# Altium PCB stc15.PcbDoc
Units mil, origin at the board's own origin, x right, y up, seen from the top; angles counter-clockwise.
Board outline 820 x 900 mil, 2 copper layers (Top Layer, Bottom Layer); 10 components, 12 nets, 53 pads, 8 vias.
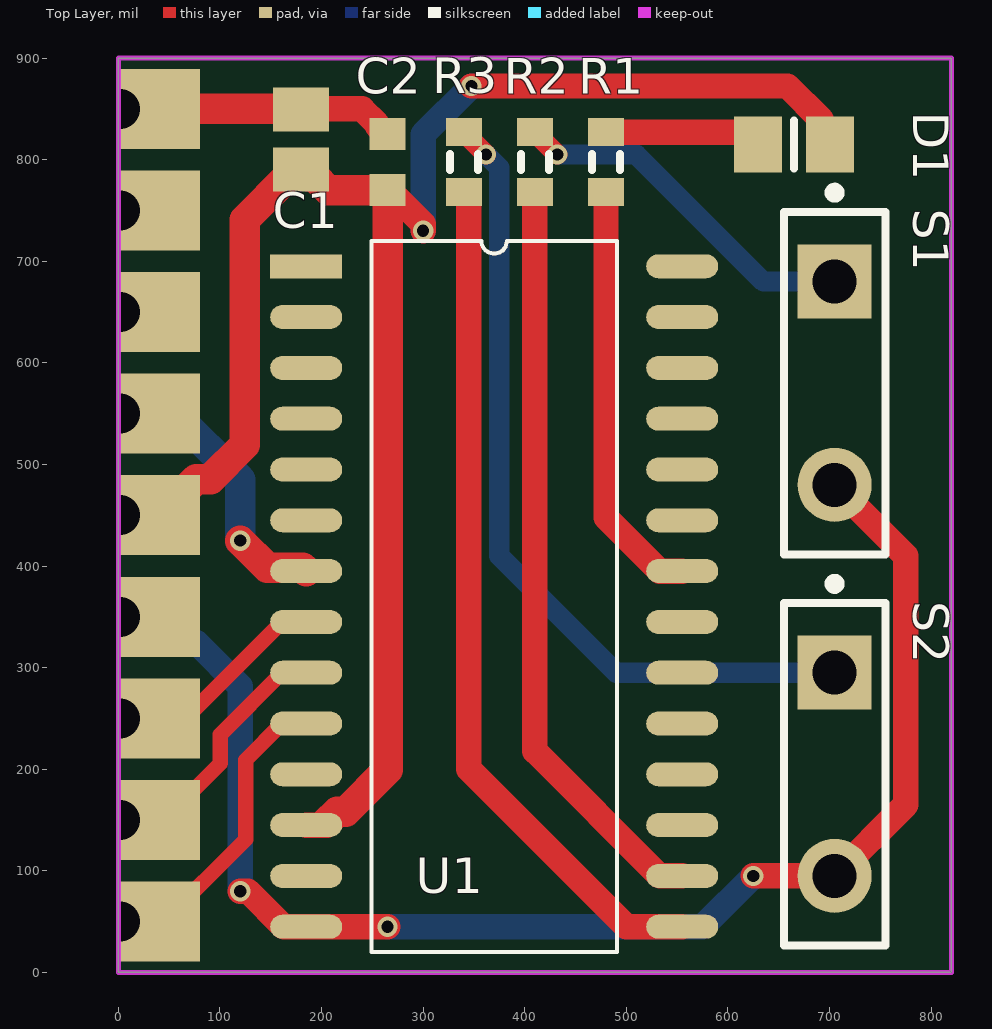
[diagram p0: Top Layer view]
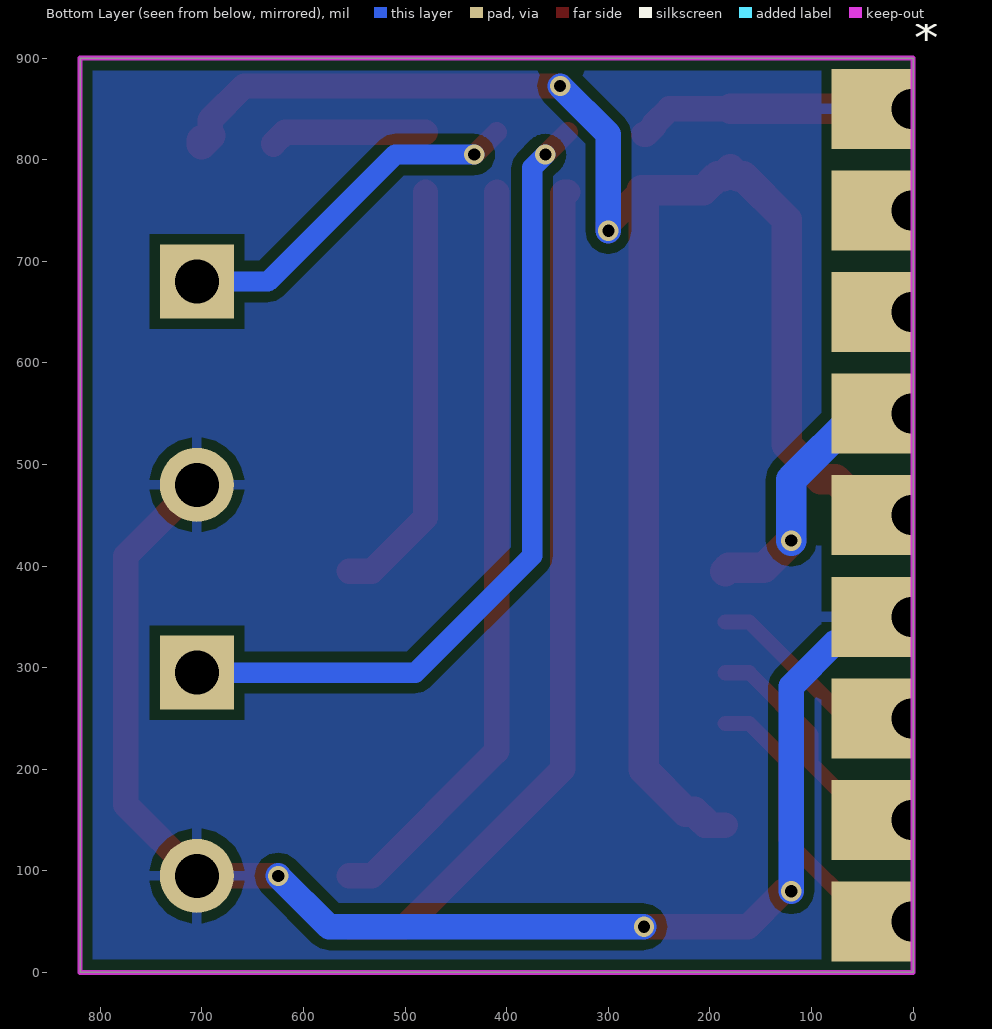
[diagram p1: Bottom Layer view, seen from below]

## Layer stack, top to bottom
Top Solder: solder mask 0.4, Solder Resist, Dk 3.5
Top Layer: signal copper 1.4
Dielectric 1: dielectric 12.6, FR-4, Dk 4.8
Bottom Layer: signal copper 1.4
Bottom Solder: solder mask 0.4, Solder Resist, Dk 3.5

## Board outline
0,0 0,900 820,900 820,0

## Design rules (kind name [scope] priority, off if disabled: settings)
Clearance [All] p1: gap=10 ignorepadtopadclearanceinfootprint=FALSE except(0: Arc-Hole Track-Hole SMDPad-Hole THPad-Hole Via-Hole Fill-Hole Poly-Hole Region-Hole Text-Hole)
PolygonConnect [All] p1: connectstyle=Relief reliefconductorwidth=10 reliefentries=4 polygonreliefangle="90 Angle" airgapwidth=10
RoutingVias [All] p1: holewidth=20 width=25 viastyle="Through Hole" minholewidth=12 minwidth=20 maxholewidth=25 maxwidth=30
SolderMaskExpansion [All] p1: expansion=4 istentingtop=FALSE
Width [All] p1: maxlimit=30 minlimit=15 preferedwidth=25 minimp=50.000000 maximp=50.000000 favimp=50.000000
Width Width_GND [InNet('GND')] p2: maxlimit=30 minlimit=20 preferedwidth=30 minimp=50.000000 maximp=50.000000 favimp=50.000000
30 further rules are at their usual default settings.

## Classes and differential pairs
component class stc15: * C1 C2 D1 R1 R2 R3 S1 S2

## Components (designator, comment, footprint, x,y, rotation, side; value= is the part's Value field where it differs from the comment)
* "9" 9 1.68,50 r90 bottom
C1 "Cap Pol3" C0805 180,820 r90 top value=100pF
C2 "Cap Semi" 1608[0603] 265,797.44 r270 top value=100pF
D1 "LED2" 6-0805_N 665,815 r180 top
R1 "Res3" J1-0603 480,797.44 r90 top value=1K
R2 "Res3" J1-0603 410,797.44 r90 top value=1K
R3 "Res3" J1-0603 340,797.44 r90 top value=1K
S1 "SW-PB" SPST-2 705,580 r270 top
S2 "SW-PB" SPST-2 705,195 r270 top
U1 "STC15W401AS_SOP28_TSSOP28_SKDIP28" SOP28 184.92,695 r0 top

## Footprints (in the part's own frame and the unit in brackets; to place one, negate y for a bottom-side part, rotate by r counter-clockwise, add the part's x,y. Pads: shape width x height; smd on the part's side, far side on the other; paste and mask are expansions set on the pad)
6-0805_N [mm] "Chip Resistor, Body 2.0x1.2mm, IPC Medium Density"
  rect 1.2x1.4 smd: 1(-0.9,0) 2(0.9,0)
  silkscreen extent 0,-0.6 0,0.6, body extent -1.07,-0.7 1.07,0.7, height 0.7
9 [mm]
  rect 2x2 hole 1 copper offset 0,1: 1(0,0) 2(2.54,0) 3(5.08,0) 4(7.62,0) 5(10.16,0) 6(12.7,0) 7(15.24,0) 8(17.78,0) 9(20.32,0)
1608[0603] [mm] "Chip Capacitor, Body 1.6x0.8mm, IPC High Density"
  rect 0.8x0.9 smd: 1(-0.7,0) 2(0.7,0)
  body extent -0.87,-0.48 0.87,0.48, height 1.3
C0805 [mm] "Chip Capacitor, Body 2.0x1.3mm, IPC High Density"
  rect 1.1x1.4 smd: 1(-0.75,0) 2(0.75,0)
  body extent -1.1,-0.72 1.1,0.72, height 1.4
J1-0603 [mm] "Chip Resistor, Body 1.6x0.8mm, IPC High Density"
  rect 0.7x0.9 smd: 1(-0.75,0) 2(0.75,0)
  silkscreen extent -0.2,-0.35 0.2,0.35, body extent -0.85,-0.48 0.85,0.48, height 0.9
SOP28 [mm]
  rect 1.8x0.6 smd: 1(0,0)
  oval 1.8x0.6 smd: 2(0,-1.27) 3(0,-2.54) 4(0,-3.81) 5(0,-5.08) 6(0,-6.35) 7(0,-7.62) 8(0,-8.89) 9(0,-10.16) 10(0,-11.43) 11(0,-12.7) 12(0,-13.97) 13(0,-15.24) 14(0,-16.51) 15(9.4,-16.51) 16(9.4,-15.24) 17(9.4,-13.97) 18(9.4,-12.7) 19(9.4,-11.43) 20(9.4,-10.16) 21(9.4,-8.89) 22(9.4,-7.62) 23(9.4,-6.35) 24(9.4,-5.08) 25(9.4,-3.81) 26(9.4,-2.54) 27(9.4,-1.27) 28(9.4,0)
  silkscreen extent 1.64,-17.14 7.77,0.64
SPST-2 [mm] "Switch; 2 Leads"
  rect 1.85x1.85 hole 1.1: 1(-2.54,0)
  round 1.85 hole 1.1: 2(2.54,0)
  silkscreen extent -4.89,-1.27 4.28,1.27

## Part data
C1: "Polarized Capacitor (Surface Mount)", LatestRevisionDate=29-May-2009, LatestRevisionNote="IPC-7351 Footprint Added.", PackageDescription="Chip Capacitor", PackageReference=C0805, Published=8-Jun-2000, Publisher="Altium Limited"
C2: "Capacitor (Semiconductor SIM Model)", LatestRevisionDate=29-May-2009, LatestRevisionNote="IPC-7351 Footprint Added.", PackageDescription="Chip Capacitor", PackageReference=C1206, Published=8-Jun-2000, Publisher="Altium Limited"
D1: "Typical RED, GREEN, YELLOW, AMBER GaAs LED", LatestRevisionDate=17-Jul-2002, LatestRevisionNote="Re-released for DXP Platform.", PackageDescription="SM LED; 2 Flat Leads", PackageReference=3.2X1.6X1.1, PackageVersion=Feb-2002, Published=8-Jun-2000, Publisher="Altium Limited"
R1 R2 R3: "Resistor", LatestRevisionDate=29-May-2009, LatestRevisionNote="IPC-7351 Footprint Added.", PackageDescription="Chip Resistor", PackageReference=J1-0603, Published=8-Jun-2000, Publisher="Altium Limited"
S1 S2: "Switch", LatestRevisionDate=17-Jul-2002, LatestRevisionNote="Re-released for DXP Platform.", PackageDescription="Switch; 2 Leads", PackageReference=SPST-2, Published=24-Mar-1999, Publisher="Altium Limited"

## Via types
v1: diameter 20, hole 12, Top Layer to Bottom Layer, 8 vias

## Nets (pads, with @x,y where several pads share a name; then routed paths per layer and width w, separated by ;. In a path a pad name is that pad's centre, name@x,y a point inside that pad or via, vN(x,y) a via of type N, cw(c..) or ccw(c..) an arc to the next point about the centre after c; other vN are vias at no path point)
CH1: *.1 U1.10 | length 309.8
  Top Layer w15: *.1 44.55,50 125.43,130.88 125.43,209.13 161.3,245 U1.10
CH2: *.2 U1.9 | length 259.8
  Top Layer w15: *.2 44.55,150 100.43,205.88 100.43,234.13 161.3,295 U1.9
CH3: *.3 U1.8 | length 222.6
  Top Layer w15: *.3 66.3,250 161.3,345 U1.8
GND: *.4 *.9 C1.2 C2.1 S1.2 S2.2 U1.14 | length 1686.3
  Top Layer w25: v1(120,80) 127.68,80 162.68,45 U1.14 v1(265,45) ; C1.2@179.53,850 240,850 254.64,835.36 254.64,833.39 263.03,825 C2.1 ; v1(625,95) S2.2 775,165 775,410 S1.2
  Top Layer w30: *.9 C1.2@179.53,850
  Bottom Layer w25: *.4 27.34,324.34 77.27,324.34 120,281.62 v1(120,80) ; v1(265,45) 575,45 v1(625,95)
NetD1_2: D1.2 R1.2 | length 155
  Top Layer w25: R1.2 618.44,826.97 629.57,815.85 D1.2
NetR1_1: R1.1 U1.22 | length 417
  Top Layer w25: R1.1 480,447.76 532.76,395 U1.22
NetR2_1: R2.1 U1.16 | length 746
  Top Layer w25: R2.1 410,217.76 532.76,95 U1.16
NetR2_2: R2.2 S1.1 | length 355.9
  Top Layer w20: R2.2 v1(431.97,805)
  Bottom Layer w20: v1(431.97,805) 510,805 635,680 S1.1
NetR3_1: R3.1 U1.15 | length 846.4
  Top Layer w25: R3.1 343.72,767.91 345,766.63 345,200 500,45 U1.15
NetR3_2: R3.2 S2.1 | length 809.1
  Top Layer w20: R3.2 v1(361.97,805)
  Bottom Layer w20: v1(361.97,805) 375,791.97 375,410 490,295 S2.1
RSSI: *.6 U1.7 | length 282.7
  Top Layer w30: v1(120,425) 146.81,398.19 181.73,398.19 U1.7
  Bottom Layer w30: *.6 55.15,550 120,485.15 v1(120,425)
VCC: *.5 C1.1 C2.2 D1.1 U1.12 | length 1833.4
  Top Layer w25: U1.12 205.35,145 U1.12@205.35,148.19 ; C2.2@266.97,769.88 300,736.85 v1(300,730) ; v1(347.5,872.5) 658.6,872.5 691.81,839.29 D1.1@691.81,823.62
  Top Layer w30: *.5 55.15,450 55.15,464.1 76.69,485.63 90.78,485.63 124.49,519.34 124.49,740.87 167.44,783.82 173.35,783.82 C1.1 186.65,783.82 192.56,783.82 206.5,769.88 C2.2 ; U1.12@205.35,148.19 215.35,158.19 223.79,158.19 265,199.4 C2.2 ; C2.2@266.97,769.88 C2.2 ; D1.1@691.81,823.62 D1.1 D1.1@700.43,818.94
  Bottom Layer w25: v1(300,730) 300,825 v1(347.5,872.5)
pads on no net: *.7 *.8 U1.1 U1.2 U1.3 U1.4 U1.5 U1.6 U1.11 U1.13 U1.17 U1.18 U1.19 U1.20 U1.21 U1.23 U1.24 U1.25 U1.26 U1.27 U1.28

## Polygon pours and split planes (outlines as drawn)
GND on Bottom Layer "GND_L02_P001" (solid, remove dead copper, pour order 1): 0,900 820,900 820,0 0,0

## Keep-outs
Keep-Out Layer:
  the board outline again, w5